# Altium PCB ArgoFC.PcbDoc (part 3 of 5)
Units mm, origin at the board's own origin, x right, y up, seen from the top; angles counter-clockwise.
Board outline 177.8 x 177.8 mm, 4 copper layers (Top Layer, GND Plane, PWR Plane, Bottom Layer), stack 0.603 mm thick; 373 components, 236 nets, 1289 pads, 686 vias.
Unrouted connection lines stored in the file: 16.
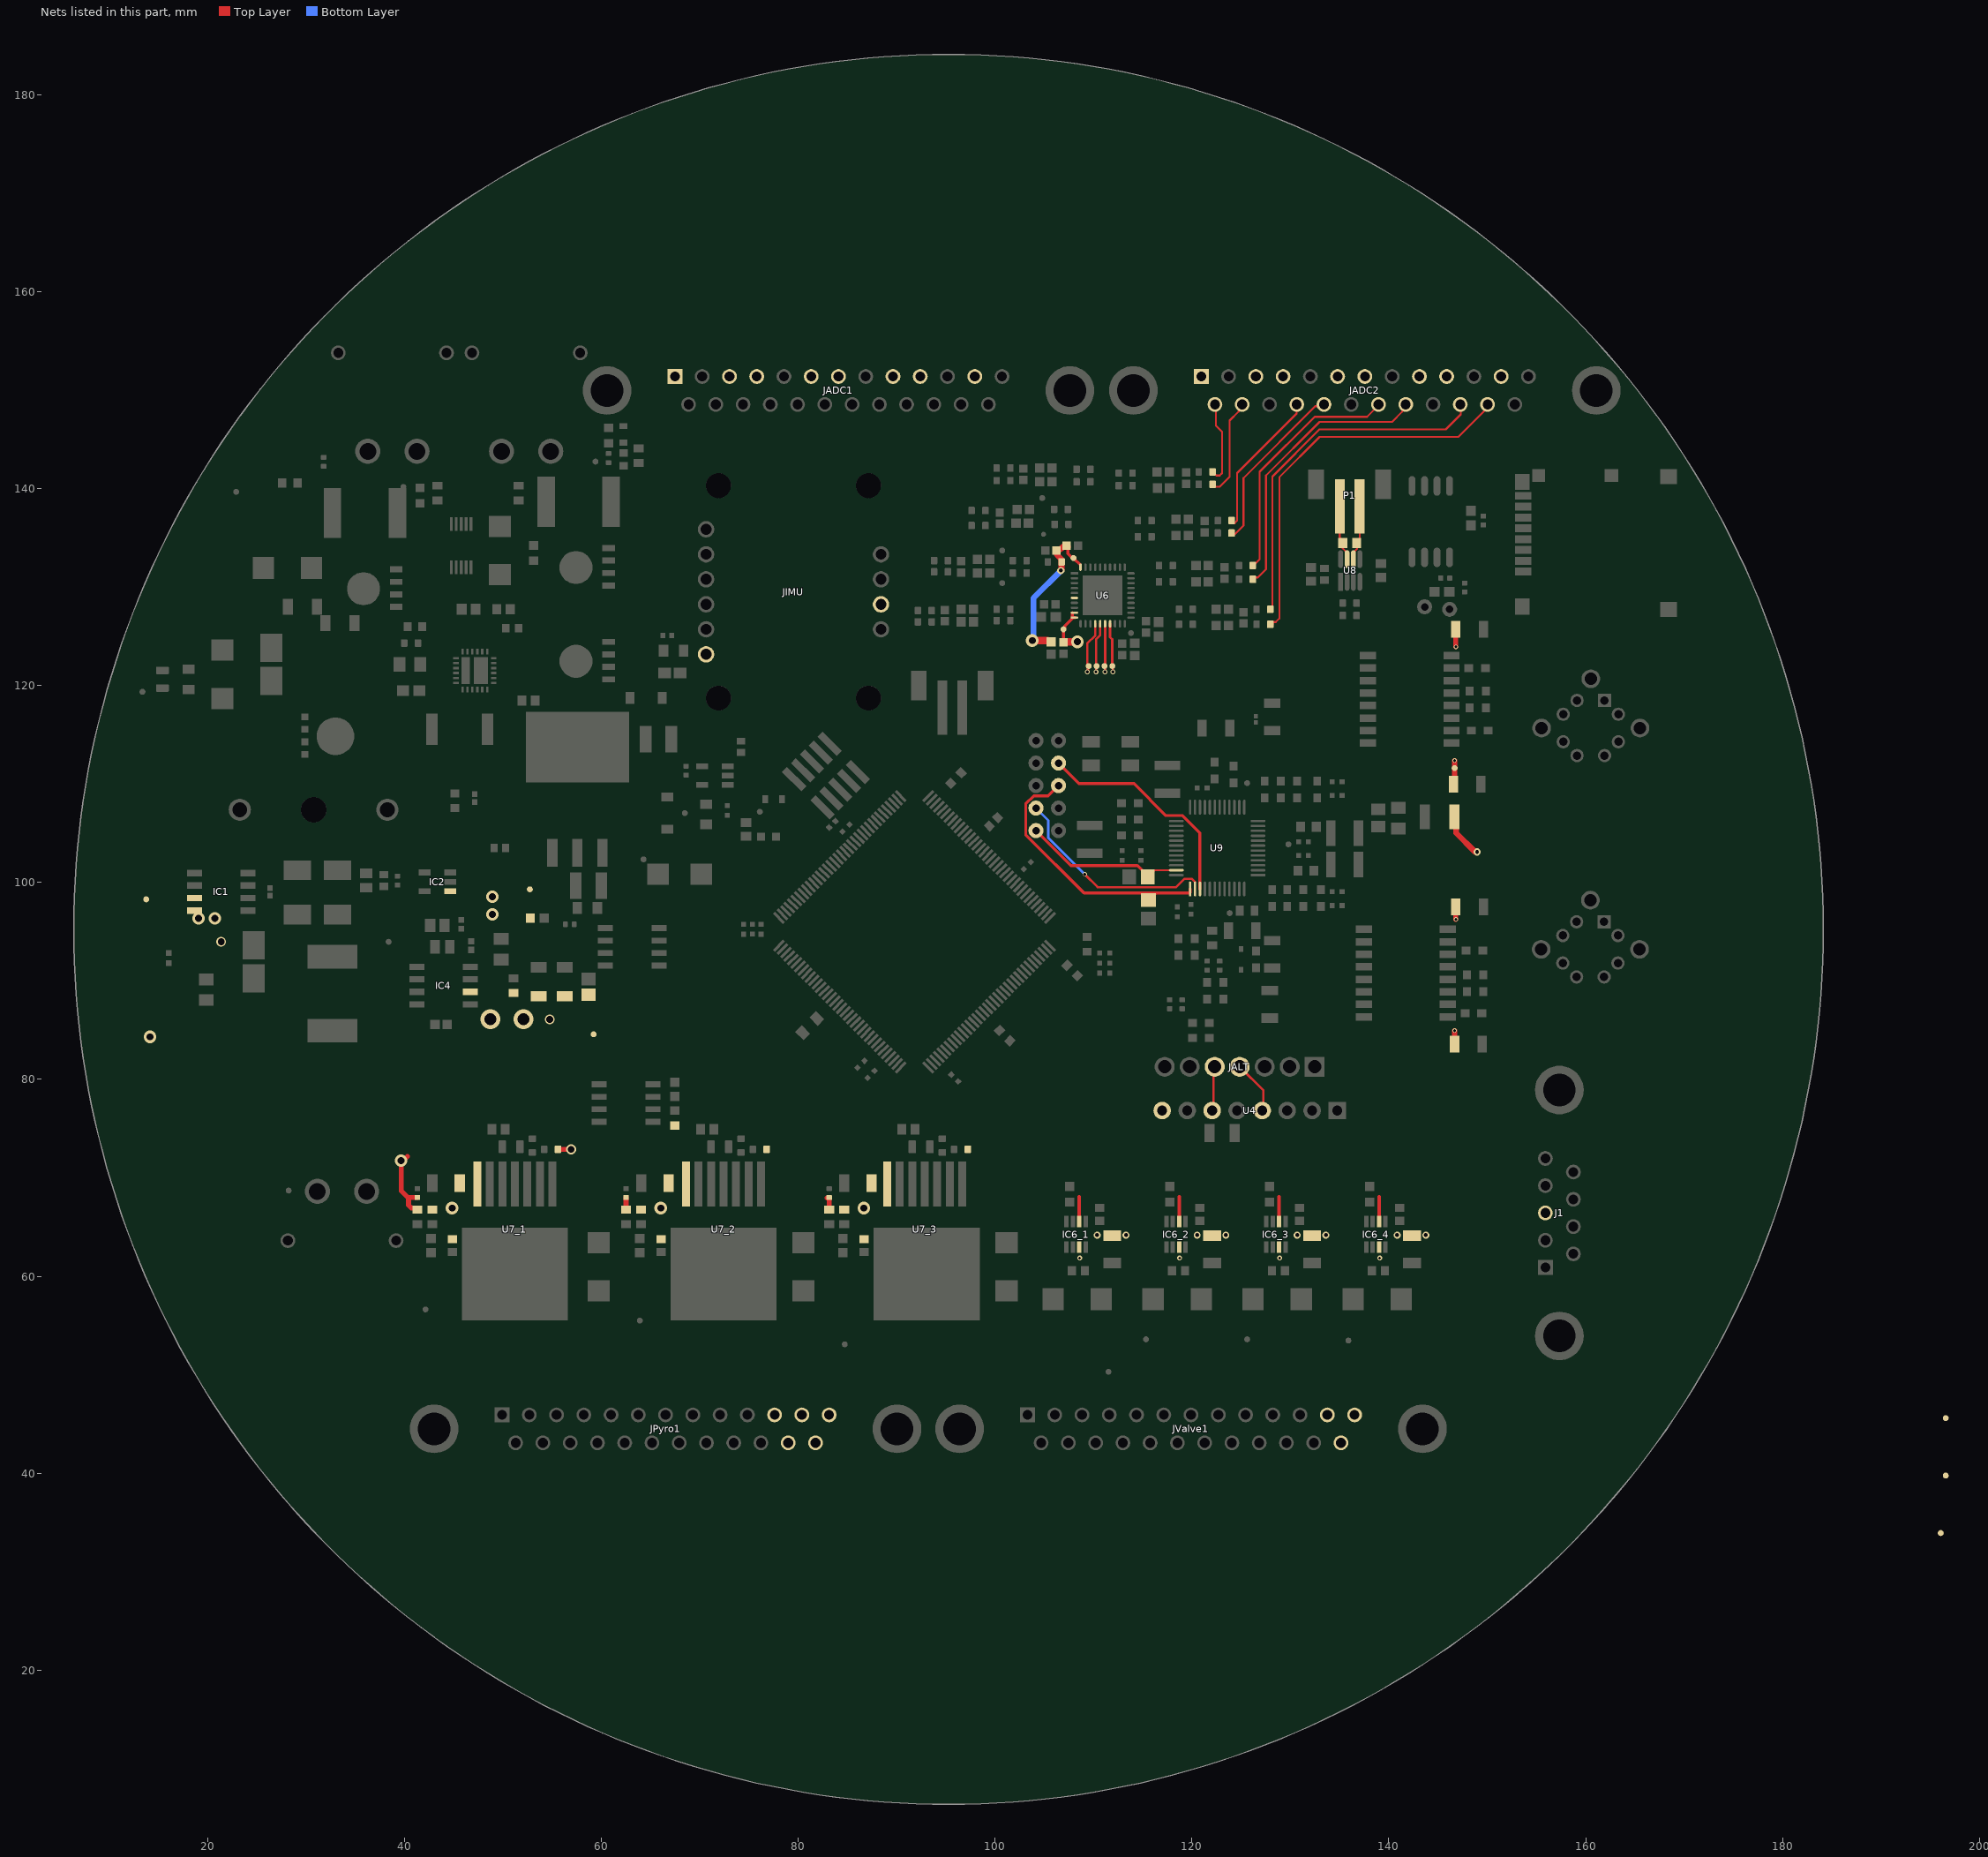
[diagram p4: the nets of this part, all layers, seen from the top]

## Part data (continued)
R8 R62_1 R62_2 R62_3 R63_1 R63_2 R63_3: library part CMP-009-00023-5, "Chip Resistor, 100 KOhm, +/- 1%, 0.1 W, -55 to 155 degC, 0603 (1608 Metric)", Case/Package=0603, Max Operating Temperature=155°C, Min Operating Temperature=-55°C, Power=100mW, Tolerance=1%, Voltage Rating=50V, Mounting Technology=SM, Pins=2, RoHS Compliant=True
R9 R11 RIMON1: library part CMP-2001-04908-2, "RES Thick Film, 10kΩ, 1%, 0.125W, 100ppm/°C, 0805", Case Code (Imperial)=0805, Case Code (Metric)=2012, Max Operating Temperature=155°C, Min Operating Temperature=-55°C, Package Quantity=5000, Power Rating=125mW, Resistance=10kR, Temperature Coefficient=100ppm/°C, Tolerance=1%, Voltage Rating=150V, Case/Package=0805, Composition="Thick Film", Contact Plating=Tin, Depth=1.25mm, Height=0.45mm, Lead Free="Lead Free", Length=2mm, Military Standard=Not, Packaging="Tape and Reel", Radiation Hardening=No, Termination=SMD/SMT, Voltage Rating (DC)=150V, Weight=0.000194oz, Width=1.25mm
R10: library part CMP-2002-08356-2, "RES Thick Film, 20kΩ, 1%, 0.063W, 100ppm/°C, 0402", Case Code (Imperial)=0402, Case Code (Metric)=1005, Max Operating Temperature=155°C, Max Power Dissipation=63mW, Min Operating Temperature=-55°C, Package Quantity=10, Resistance=20kR, Temperature Coefficient=100ppm/°C, Tolerance=1%, Voltage Rating=50V, Case/Package=0402, Composition="Thick Film", Contact Plating=Tin, Depth=0.5mm, Features="Automotive AEC-Q200", Height=0.35mm, Lead Free="Lead Free", Length=1mm, Military Standard=Not, Mount="Surface Mount", Number of Pins=2, Number of Terminations=2, Packaging="Tape and Reel", Power Rating=63mW, Radiation Hardening=No, Termination=SMD/SMT, Voltage Rating (DC)=50V, Weight=2.3E-05oz, Width=0.5mm, Working Voltage=50V
R12: library part CMP-2002-08313-2, "CRCW04021K96FKED  RES Thick Film, 1.96kΩ, 1%, 0.063W, 100ppm/°C, 0402", Case Code (Imperial)=0402, Case Code (Metric)=1005, Max Operating Temperature=155°C, Max Power Dissipation=63mW, Min Operating Temperature=-55°C, Package Quantity=10, Resistance=1.96kR, Temperature Coefficient=100ppm/°C, Tolerance=1%, Voltage Rating=50V, Case/Package=0402, Composition="Thick Film", Contact Plating=Tin, Depth=0.5mm, Features="Automotive AEC-Q200", Height=0.35mm, Length=1mm, Military Standard=Not, Number of Pins=2, Number of Terminations=2, Packaging="Tape and Reel", Power Rating=63mW, Radiation Hardening=No, Termination=SMD/SMT, Weight=2.3E-05oz, Width=0.5mm
R13 R70: library part CMP-009-00199-1, "Chip Resistor, 20 Ohm, +/- 1%, 100 mW, -55 to 155 degC, 0603 (1608 Metric)", Case/Package=0603, Max Operating Temperature=155°C, Min Operating Temperature=-55°C, Power=100mW, Tolerance=1%, Voltage Rating=75V, Mounting Technology=SM, Pins=2, RoHS Compliant=True
R16: library part CMP-2003-04797-2, "RES Thick Film, 0Ω, 0.25W, 1206", Case Code (Imperial)=1206, Case Code (Metric)=3216, Max Operating Temperature=155°C, Max Power Dissipation=250mW, Min Operating Temperature=-55°C, Package Quantity=10000, Resistance=0mR, Voltage Rating=200V, Case/Package=1206, Composition="Thick Film", Contact Plating=Tin, Depth=1.6mm, Features="Automotive AEC-Q200", Height=0.024inch, Lead Free="Lead Free", Length=3.2mm, Military Standard=Not, Number of Terminations=2, Packaging="Tape and Reel", Power Rating=250mW, Radiation Hardening=No, Termination=SMD/SMT, Voltage Rating (DC)=200V, Weight=0.000353oz, Width=0.063inch
R18_1 R18_2 R18_3 R18_4: library part 0603WAF5101T5E, "0603 5K resistor, Pick based component in JLCPCB lib", Manufacturer_Name="UNI-ROYAL(Uniroyal Elec)", Datasheet Link=https://datasheet.lcsc.com/szlcsc/Uniroyal-Elec-0603WAF5101T5E_C23186.pdf, Height=0.55mm, Manufacturer_Part_Number=0603WAF5101T5E
R19 R20 R21 R22 R23 R24 R25 R26 R27 R28 R29 R30 R31 R32 R33 R34 R35 R36 R37 R38 R39 R40 R41 R42 R43 R44 R45 R46 R47 R48 R49 R50 R64_1 R64_2 R64_3 R65_1 R65_2 R65_3 RIlimit1: library part CMP-009-00176-3, "Chip Resistor, 120 Ohms, +/-5 %, 0.1 W, -55 to 155 degC, 0603", Case/Package=0603, Max Operating Temperature=155°C, Min Operating Temperature=-55°C, Power=100mW, Tolerance=5%, Pins=2
R53 R57 R74 R95: library part CMP-009-00014-5, "Chip Resistor, 1 KOhm, +/-1%, 0.1 W, -55 to 155 degC, 0603 (1608 Metric)", Case/Package=0603, Max Operating Temperature=155°C, Min Operating Temperature=-55°C, Power=100mW, Tolerance=1%, Voltage Rating=50V, Mounting Technology=SM, Pins=2, RoHS Compliant=True
R54: library part CMP-2000-00054-1, "Fixed Resistor, Thin Film, 0.1W, 210000ohm, 75V, 0.1% +/-Tol, 25ppm/Cel, Surface Mount, 0603", Manufacturer=Panasonic, Part Number=ERA3AEB392V
R55 R60: library part CMP-1012-00623-3, "Chip Resistor, 10 KOhm, +/- 1%, 0.1 W, -55 to 155 degC, 0603 (1608 Metric), RoHS, Tape and Reel", Case Code (Imperial)=0603, Case Code (Metric)=1608, Manufacturer=Panasonic, Max Operating Temperature=155degC, Max Power Dissipation=100mW, Min Operating Temperature=-55degC, Package Description="2-Pin Surface Mount Device, Body 1.6 x 0.85 mm", Package Quantity=1, Package Reference=603, Resistance=10KOhm, Temperature Coefficient=100ppm\/degreesC, Tolerance=1%, Voltage Rating=75V, Case\/Package=0603, Composition=ThickFilm, Contact Plating=Tin, Datasheet URL=https://industrial.panasonic.com/cdbs/www-data/pdf/RDA0000/AOA0000C304.pdf, Datasheet Version=02/2017, Depth=0.8mm, Height=0.45mm, Lead Free=LeadFree, Length=1.6mm, Manufacturer URL=http://www.panasonic.com/, Military Standard=Not, Mount=SurfaceMount, Mounting Technology=SurfaceMount, Number of Pins=2, Number of Terminations=2, Packaging=TapeandReel, Power Rating=100mW, Radiation Hardening=No, REACH SVHC=NoSVHC, RoHSCompliant=true, Termination=SMD/SMT, Voltage Rating (DC)=75V, Width=0.031inch
R56 Rpg1: library part CMP-2000-02954-1, "Fixed Resistor, Metal Glaze/thick Film, 0.1W, 18000ohm, 75V, 1% +/-Tol, 100ppm/Cel, Surface Mount, 0603", Manufacturer="Vishay Dale", Part Number=CRCW0603182KFKEA
R58: library part CMP-009-00017-5, "Chip Resistor, 10 KOhm, +/- 1%, 01 W, -55 to 155 degC, 0603 (1608 Metric)", Case/Package=0603, Max Operating Temperature=155°C, Min Operating Temperature=-55°C, Power=100mW, Tolerance=1%, Voltage Rating=50V, Mounting Technology=SM, Pins=2, RoHS Compliant=True
R66_1 R66_2 R66_3: library part CMP-009-00102-2, "470R 0.125W 5% 0805 (2012 Metric)  SMD", Case/Package=0805, Power=125mW, Tolerance=5%, Mounting Technology=SMT, Pins=2
R67_1 R67_2 R67_3: library part CMP-2000-03159-1, "CRCW06032K00FKEA", Manufacturer="Vishay Dale", Part Number=CRCW06032K00FKEA
R68 R69: library part CMP-009-00027-5, "Chip Resistor, 22 Ohm, +/- 1%, 100 mW, -55 to 155 degC, 0603 (1608 Metric)", Case/Package=0603, Max Operating Temperature=155°C, Min Operating Temperature=-55°C, Power=100mW, Tolerance=1%, Voltage Rating=75V, Mounting Technology=SM, Pins=2, RoHS Compliant=True
R72 R81 R82 R83 R85 R93 R94 R96: library part CMP-2000-04818-3, "RES 10KΩ 1.00% 0.1W 0603", Case Code (Imperial)=0603, Case Code (Metric)=1608, Max Operating Temperature=155°C, Max Power Dissipation=100mW, Min Operating Temperature=-55°C, Package Quantity=1, Ratings=AEC-Q200, Resistance=10kR, Resistor Type="Thick Film", Temperature Coefficient=100ppm/°C, Tolerance=1%, Voltage Rating=50V, Case/Package=0603, Construction=Rectangular, Depth=0.8mm, Features="Moisture Resistant", Height=0.45mm, Lead Free="Lead Free", Length=1.6mm, Military Standard=Not, Mount="Surface Mount", Number of Terminations=2, Packaging="Tape and Reel", Power Rating=100mW, RoHS Compliant=Yes, Series=AC, Size Code=0603, Termination=SMD/SMT, Width=0.8mm
R73 R80: library part CMP-2001-00644-1, Manufacturer=Panasonic, Part Number=ERA6AEB472V
R75: library part CMP-2001-04399-1, Manufacturer=Panasonic, Part Number=ERJ-6ENF1182V
R76 R77 R78 R79 R89 R90 R91 R92: library part CMP-2000-04466-2, "RES SMD 49.9 OHM 0.1% 1/10W 0603", Manufacturer=Yageo, Manufacturer Part Number=RT0603BRD0749R9L, Package=RT0603, Power Rating=0.1W, Temperature="-55°C to +155°C", Temperature Coefficient="25 ppm/°C", Temperature Range High=+155°C, Temperature Range Low=-55°C, Tolerance=0.001, Voltage Rating=75V, Automotive=No, Category=Res, ComponentLink2Description=Datasheet, ComponentLink2URL=http://www.yageo.com/documents/recent/PYu-RT_1-to-0.01_RoHS_L_9.pdf, Composition="Thin Film", Device Class L1="Passive Components", Device Class L2=Resistors, Device Class L3="Chip SMD Resistors", Digikey Description="RES SMD 49.9 OHM 0.1% 1/10W 0603", Footprint Url=http://www.yageo.com/exep/pages/download/literatures/PYu-R_Mount_10.pdf, Height=0.55mm, Ipc Land Pattern Name=RESC16080X45, Lead Free=Yes, Mouser Description="Res Thin Film 0603 49.9 Ohm 0.1% 1/10W ±25ppm/°C Molded SMD SMD Paper T/R", Octopart=https://octopart.com/rt0603brd0749r9l-yageo-1274115, Resistance=49.9Ω, RoHS=TRUE, Series=RT
R84 R86 R87 R88 R98 R99 R100 R102: library part CMP-03412-022448-1, "RES SMD 75 OHM 0.5% 1/10W 0603", Manufacturer=Yageo, Manufacturer Part Number=RT0603DRE0775RL, Package=RT0603, Power Rating=0.1W, Temperature="-55°C to +155°C", Temperature Coefficient="50 ppm/°C", Temperature Range High=+155°C, Temperature Range Low=-55°C, Tolerance=0.005, Voltage Rating=75V, Automotive=No, Category=Res, ComponentLink2Description=Datasheet, ComponentLink2URL=http://www.yageo.com/documents/recent/PYu-RT_1-to-0.01_RoHS_L_9.pdf, Composition="Thin Film", Device Class L1="Passive Components", Device Class L2=Resistors, Device Class L3="Chip SMD Resistors", Digikey Description="RES SMD 75 OHM 0.5% 1/10W 0603", Footprint Url=http://www.yageo.com/exep/pages/download/literatures/PYu-R_Mount_10.pdf, Height=0.55mm, Ipc Land Pattern Name=RESC16080X45, Lead Free=Yes, Octopart=https://octopart.com/rt0603dre0775rl-yageo-1170737, Resistance=75Ω, RoHS=TRUE, Series=RT
R97 R101 R103 R104: library part CMP-03412-006815-1, "RES SMD 220 OHM 1% 1/10W 0603", Manufacturer=Yageo, Manufacturer Part Number=RT0603FRE07220RL, Package=RT0603, Power Rating=0.1W, Temperature="-55°C to +155°C", Temperature Coefficient="50 ppm/°C", Temperature Range High=+155°C, Temperature Range Low=-55°C, Tolerance=0.01, Voltage Rating=75V, Automotive=No, Category=Res, ComponentLink2Description=Datasheet, ComponentLink2URL=http://www.yageo.com/documents/recent/PYu-RT_1-to-0.01_RoHS_L_9.pdf, Composition="Thin Film", Device Class L1="Passive Components", Device Class L2=Resistors, Device Class L3="Chip SMD Resistors", Digikey Description="RES SMD 220 OHM 1% 1/10W 0603", Footprint Url=http://www.yageo.com/exep/pages/download/literatures/PYu-R_Mount_10.pdf, Height=0.55mm, Ipc Land Pattern Name=RESC16080X45, Lead Free=Yes, Mouser Description="Thin Film Resistors 1/10W 220 ohm 1% 50ppm", Octopart=https://octopart.com/rt0603fre07220rl-yageo-39861932, Resistance=220Ω, RoHS=TRUE, Series=RT
RC1: library part CMP-009-00001-5, "Chip Resistor, 0 Ohm, +/- 1%, 125 mW, -55 to 155 degC, 0805 (2012 Metric)", Case/Package=0805, Max Operating Temperature=155°C, Min Operating Temperature=-55°C, Power=125mW, Tolerance=1%, Voltage Rating=150V, Mounting Technology=SM, Pins=2, RoHS Compliant=True
RG1: library part CMP-02407-006382-1, "RES Thick Film, 2Ω, 5%, 1W, 200ppm/°C, 2512", Case Code (Imperial)=2512, Case Code (Metric)=6432, Max Operating Temperature=155°C, Max Power Dissipation=1W, Min Operating Temperature=-55°C, Package Quantity=1, Resistance=2R, Temperature Coefficient=200ppm/°C, Tolerance=5%, Voltage Rating=500V, Case/Package=2512, Composition="Thick Film", Contact Plating=Tin, Depth=3.15mm, Features="Automotive AEC-Q200", Height=0.6mm, Lead Free="Lead Free", Length=6.3mm, Military Standard=Not, Number of Pins=2, Number of Terminations=2, Packaging="Tape and Reel", Power Rating=1W, Radiation Hardening=No, Termination=SMD/SMT, Voltage Rating (DC)=500V, Weight=0.001429oz, Width=0.124inch
Rhold1: library part CMP-009-00138-3, "Chip Resistor, 2 kOhms, +/-5 %, 63 mW, -55 to 155 degC, 0402", Case/Package=0402, Max Operating Temperature=155°C, Min Operating Temperature=-55°C, Power=63mW, Tolerance=5%, Pins=2
RS1_1 RS1_2 RS1_3: library part CMP-2000-03379-3, "RES SMD 47K OHM 1% 1/10W 0603 CRCW060347K0FKEA", Case Code (Imperial)=0603, Case Code (Metric)=1608, Max Operating Temperature=155°C, Max Power Dissipation=100mW, Min Operating Temperature=-55°C, Package Quantity=5000, Resistance=47kR, Resistance Tolerance=1%, Resistor Type="Thick Film", Temperature Coefficient=100ppm/°C, Voltage Rating=75V, Case/Package=0603, Construction=Rectangular, Contact Plating=Tin, Depth=0.85mm, Features="Automotive AEC-Q200", Height=0.45mm, Lead Free="Lead Free", Length=1.55mm, Military Standard=Not, Mount="Surface Mount", Number of Terminations=2, Packaging="Tape and Reel", Power Rating=100mW, Radiation Hardening=No, RoHS Compliant=Yes, Series=CRCW, Size Code=0603, Technology="THICK FILM", Termination=SMD/SMT, Tolerance=1%, Voltage Rating (DC)=75V, Weight=7.1E-05oz, Width=0.85mm
RT1: library part CMP-06022-000553-2, "NTC Thermistor for Temperature Sensor, 0603, 47kΩ, 5%, 0.046mA, 5V", Case Code (Imperial)=0603, Case Code (Metric)=1608, Current Rating=140uA, Max Operating Temperature=125°C, Max Power Dissipation=100mW, Min Operating Temperature=-40°C, Package Quantity=4000, Resistance=47kR, Resistance Tolerance=5%, Accuracy=0.5%, Case/Package=0603, Depth=0.8mm, Height=0.8mm, Lead Free="Lead Free", Length=1.6mm, Mount="Surface Mount", Number of Pins=2, Packaging="Tape and Reel", Power Rating=100mW, Radiation Hardening=No, REACH SVHC="No SVHC", Series=NCP, Termination=SMD/SMT, Thickness=150um, Tolerance=5%, Width=0.8mm
T1 T2: library part CMP-2000-05323-2, "MODULE XFRMR SGL ETHR LAN 16SOIC", Case/Package=Module, DC Resistance (DCR)=1.5R, Isolation Voltage=1.5kV, Max Operating Temperature=85°C, Min Operating Temperature=-40°C, Package Quantity=40, Depth=9.53mm, Height=5.97mm, Height - Seated (Max)=6.22mm, Insertion Loss=-1dB, Lead Free="Lead Free", Lead/Base Style="Gull Wing", Length=12.7mm, Mount="Surface Mount", Number of Pins=16, Packaging=Rail/Tube, Radiation Hardening=No, Return Loss=-12dB, RoHS Compliant=Yes, Series=-, Shielding=Unshielded, Termination=SMD/SMT, Turns Ratio=1:1, Width=7.11mm
TP1 TP2 TP3 TP4 TP5 TP6 TP7 TP8 TP15_1 TP15_2 TP15_3 TP15_4 TP16 TP17 TP18 TP19 TP20 TP21 TP22 TP23 TP24 TP25 TP26 TP27_1 TP27_2 TP27_3 TP28_1 TP28_2 TP28_3 TP29 TP30 TP31 TP32 TPCS1 TPMISO1 TPMOSI1 TPSCLK1: library part CMP-00028-00002-2, "0.6mm round", Pins=1
U1 U2: library part CMP-014-00017-2, "Single Supply Dual Operational Amplifier, 3 to 32 V, 0 to 70 degC, 8-Pin SOIC, Pb-Free, Tape and Reel", Case/Package=SOIC, Manufacturer="ON Semiconductor", Max Dual Supply Voltage=16V, Max Input Voltage=28.3V, Max Operating Temperature=70°C, Max Supply Voltage=44V, Min Dual Supply Voltage=1.5V, Min Input Voltage=0uV, Min Operating Temperature=0°C, Min Supply Voltage=2.3V, Nominal Dual Supply Voltage=12V, Nominal Supply Current=35uA, Nominal Voltage Gain=100dB, Output Current=40mA, Package Description="8-Pin Small Outline Integrated Circuit, Body 4.9 x 3.9 mm, Pitch 1.27 mm", Package Quantity=2500, Package Reference=SOIC-8-751-07, Channels=2, Common Mode Rejection Ratio=65dB, Datasheet URL=http://www.onsemi.cn/pub_link/Collateral/LM358-D.PDF, Datasheet Version="Rev. 32, 10/2016", Manufacturer URL=http://www.onsemi.com/, Mounting Technology=SM, Nominal Gain Bandwith Product=200KHz, Nominal Supply Voltage=12V, Packaging=TapeandReel, Pins=8, RoHS Compliant=True, Slew Rate=0.07V/us
U3: library part CMP-0062-00591-5, "5A Low Dropout Positive Regulators, 3-pin TO-263, Pb-Free", Manufacturer="Texas Instruments", PackageTopMarking=NSUZXYTTE#*LM1084*IS-3.3, PartNumber=LM1084IS-3.3/NOPB, PowerWise=N, Code_JEDEC=MO-169-AA, ComponentLink1Description="Datasheet URL", ComponentLink1URL=http://www.ti.com/general/docs/lit/getliterature.tsp?genericPartNumber=LM1084&fileType=pdf, CompType="LDO IC", High-Reliability=Y, PackageDescription="TO-263, Molded, .400 x .390 x .180in, 3 Lead, .1in Pitch, Surface Mount", PackageReference=KTT0003B, PinCount=3, RoHS=Y
U4: library part CMP-144239-000001-1, "BMP388 - PRECISION BAROMETRIC PR"
U5: library part CMP-0378-00041-1, "16 Mbit SPI Serial Flash, 2.7 to 3.6 V, 50 MHz, 0 to 70 degC, 8-pin SOIC (S2A8), Tube", Manufacturer=Microchip, ComponentLink1Description="Manufacturer URL", ComponentLink1URL=http://www.microchip.com, ComponentLink2Description=Datasheet, ComponentLink2URL=http://ww1.microchip.com/downloads/en/DeviceDoc/25044A.pdf, ComponentLink3Description="Package Specification", ComponentLink3URL=http://ww1.microchip.com/downloads/en/DeviceDoc/25051A.pdf, ComponentLink4Description="Product URL", ComponentLink4URL=http://www.microchip.com/SST25VF016B, DatasheetVersion="Rev. A", Mounting Technology="Surface Mount", PackageDescription="8-Lead Plastic Small Outline Intergrated Circuit, 5.275 x 5.275 mm Body, 1.27 mm Pitch", PackageReference=SOIC-S2A8, PackageVersion="Rev. A", PartNumber=SST25VF016B-50-4C-S2AF
U6: library part CMP-09081-000008-1, "IC ADC 24BIT SIGMA-DELTA 40LFCSP", Case/Package="LFCSP EP", Max Input Voltage=2.5V, Max Operating Temperature=105°C, Max Power Dissipation=28mW, Max Supply Voltage=5.5V, Min Operating Temperature=-40°C, Min Supply Voltage=2V, Nominal Supply Current=2.12mA, Operating Supply Voltage=5V, Package Quantity=490, Power Dissipation=9.96mW, Contact Plating=Tin, Height=0.75mm, Interface=SPI, Lead Free="Contains Lead", Length=6.1mm, Min Input Voltage=2.5V, Mount="Surface Mount", Number of A/D Converters=1, Number of Bits=24, Number of Channels=16, Number of Converters=1, Number of Elements=1, Number of Pins=40, Output Type=TTL, Packaging=Tray, Polarity=Bipolar, REACH SVHC="No SVHC", Reference Voltage=2.5V, Resolution=24b, Sampling Rate=31.25KS/s, Supply Type=Single, Width=6.1mm
U7_1 U7_2 U7_3: library part CMP-32854-000005-1, "IC HALF-BRIDGE DRVR 2 CH TO263", Manufacturer=Infineon, Max Junction Temp=+150°C, Max Supply Voltage=40V, Min Supply Voltage=8V, Nominal Supply Current=2.3mA, Package=PG-TO263-7, Temperature="-40°C to +150°C", Temperature Range Low=-40°C, Automotive=No, Category=IC, ComponentLink2Description=Datasheet, ComponentLink2URL=https://www.infineon.com/dgdl/Infineon-IFX007T-DS-v01_00-EN.pdf?fileId=5546d46265f064ff0166433484070b75, Device Class L1="Integrated Circuits (ICs)", Device Class L2="Power Management ICs", Device Class L3="Motor Drivers", Digikey Description="IC HALF-BRIDGE DRVR 2 CH TO263", Footprint Url=https://www.infineon.com/cms/en/product/packages/PG-TO263/PG-TO263-7-1/, Height=4.5mm, Lead Free=Yes, Manufacturer Part Number=IFX007TAUMA1, Mouser Description="integrated high current half bridge for motor drive applications", Number Of Outputs=1, Octopart=https://octopart.com/ifx007tauma1-infineon-94578162, RoHS=TRUE, Standoff Height=0.1mm, Temperature Range High=+150°C
U8: library part CMP-04872-000203-1, "IC TRANSCEIVER 1/1 SOT23-8", Case/Package=SOT-23-8, Max Operating Temperature=125°C, Min Operating Temperature=-40°C, Lead Free="Lead Free", Mount="Surface Mount", Packaging="Tape and Reel", Receiver Hysteresis=120mV, RoHS Compliant=Yes
U9: library part CMP-06281-000067-1, "IC ETHERNET SWITCH 3PORT 48-LQFP", Case/Package=LQFP, Max Operating Temperature=85°C, Max Supply Current=114mA, Max Supply Voltage=3.465V, Min Operating Temperature=-40°C, Min Supply Voltage=1.71V, Nominal Supply Current=85mA, Operating Supply Voltage=3.3V, Package Quantity=250, Data Rate=100Mbps, Height=1.45mm, Interface=I2C, Lead Free="Lead Free", Length=7.1mm, Mount="Surface Mount", Number of Functions=3, Number of Pins=48, Number of Ports=3, Number of Transceivers=3, Packaging=Tray, Radiation Hardening=No, REACH SVHC="No SVHC", RoHS Compliant=Yes, Series=-, Supply Current=85mA, Supply Voltage-Nom=3.3V, Width=7.1mm
XF1: library part CMP-1502-00234-1, "WR-FSH Fuse Holder Blocks Fuse Holder Blocks Clip Cover for PCB", Manufacturer="Wurth Elektronik", Operating Temperature=-30to120degC, Datasheet URL=https://katalog.we-online.de/em/datasheet/696105003002.pdf, Fuse Size=5x20mm, Manufacturer URL=http://www.we-online.de, Mounting Technology=THT, Package Reference=696105003002, Packaging=Box, Part Number=696105003002, Publisher=WurthElektronik

## Free pads (board coordinates)
  round 1.524 hole 0.762: 7(146.177,127.762) 8(143.637,128.016) 9(106.426,114.427) 10(106.426,112.141) 11(106.426,109.855) 12(106.426,105.283) 13(106.426,107.569) 14(104.14,114.427) 15(104.14,112.141) 16(104.14,109.855) 17(104.14,107.569) 18(104.14,105.283)

## Via types
v1: diameter 0.5, hole 0.25, Top Layer to Bottom Layer, 327 vias
v2: diameter 0.45, hole 0.3, Top Layer to Bottom Layer, 147 vias
v3: diameter 1.27, hole 0.711, Top Layer to Bottom Layer, 80 vias
v4: diameter 1, hole 0.6, Top Layer to Bottom Layer, 28 vias
v5: diameter 1, hole 0.7, Top Layer to Bottom Layer, 21 vias
v6: diameter 0.75, hole 0.5, Top Layer to Bottom Layer, 17 vias
v7: diameter 0.5, hole 0.3, Top Layer to Bottom Layer, 15 vias
v8: diameter 0.7, hole 0.4, Top Layer to Bottom Layer, 14 vias
v9: diameter 0.75, hole 0.4, Top Layer to Bottom Layer, 12 vias
v10: diameter 0.6, hole 0.35, Top Layer to Bottom Layer, 7 vias
v11: diameter 0.6, hole 0.3, Top Layer to Bottom Layer, 5 vias
v12: diameter 0.7, hole 0.5, Top Layer to Bottom Layer, 3 vias
v13: diameter 0.6, hole 0.4, Top Layer to Bottom Layer, 2 vias
v14: diameter 2, hole 1.2, Top Layer to Bottom Layer, 2 vias
v15: diameter 7.62, hole 7.62, Top Layer to Bottom Layer, 2 vias
v16: diameter 1, hole 0.5, Top Layer to Bottom Layer, 1 vias
v17: diameter 0.711, hole 0.711, Top Layer to Bottom Layer, 1 vias
v18: diameter 1, hole 0.711, Top Layer to Bottom Layer, 1 vias
v19: diameter 0.3, hole 0.2, Top Layer to Bottom Layer, 1 vias

## Nets (pads, with @x,y where several pads share a name; then routed paths per layer and width w, separated by ;. In a path a pad name is that pad's centre, name@x,y a point inside that pad or via, vN(x,y) a via of type N, cw(c..) or ccw(c..) an arc to the next point about the centre after c; other vN are vias at no path point)
5V: C57.1 C58.1 C79.1 C82.1 C83.1 IC2.1 J1.3 JADC1.1 JADC1.3 JADC1.4 JADC1.6 JADC1.7 JADC1.9 JADC1.10 JADC1.12 JADC2.1 JADC2.3 JADC2.4 JADC2.6 JADC2.7 JADC2.9 JADC2.10 JADC2.12 R2.2 TP4.1 TP18.1 TP20.1 U6.9 U6.10 U6.40 | length 20.9
  Top Layer w0.3: C57.1@106.934,124.4 TP20.1@106.934,125.603 ; TP20.1@106.934,125.73 106.934,125.811 107.069,125.946 107.069,126.056 107.922,126.909 U6.10@108.122,126.909 ; C83.1@107.373,134.114 107.373,133.419 TP18.1@107.95,132.842 ; U6.10@107.823,126.909 107.823,127.379 U6.9@107.853,127.409 ; TP18.1@108.077,132.842 U6.40@108.585,132.334
  Top Layer w0.6: C58.1@105.664,124.46 C58.1@105.692,124.488 ; v9(106.68,131.699) 106.68,131.74 106.737,131.796 106.737,132.58 C82.1@106.745,132.588 106.715,132.618 106.715,132.874 106.269,133.32 106.269,133.701 C79.1@106.239,133.731 106.364,133.856 106.584,133.856 106.715,133.987 106.772,133.987 106.899,134.114 107.123,134.114 C83.1@107.248,134.239 C83.1@107.373,134.114
  Top Layer w0.762: v3(103.759,124.587) 105.339,124.587 105.382,124.544 105.57,124.544 C58.1@105.664,124.45 ; C57.1@107.061,124.46 v3(108.338,124.46)
  Bottom Layer w0.6: v3@103.886,124.587 103.886,128.905 v9(106.68,131.699)
  other v3: 48.895,96.774 48.895,98.552
24Vin: C13.1 C14.2 C15.2 C55_1.2 C55_2.2 C55_3.2 C55_4.2 C91_1.2 C91_2.2 C91_3.2 C92_1.2 C92_2.2 C92_3.2 IC1.3 IC1.4 IC4.2 IC6_1.7 IC6_2.7 IC6_3.7 IC6_4.7 JPyro1.11 JPyro1.12 JPyro1.13 JPyro1.24 JPyro1.25 JValve1.12 JValve1.13 JValve1.25 R3.2 R8.2 R62_1.2 R62_2.2 R62_3.2 TP2.1 TP6.1 U7_1.7 U7_2.7 U7_3.7
  other v1: 108.585,61.849 118.745,61.849 128.905,61.849 139.065,61.849
  other v3: 44.799,66.929 66.008,66.929 86.655,66.929 14.097,84.328 19.05,96.358 20.701,96.358
  other v5: 54.737,86.106 21.336,93.98
  other v8: 110.363,64.179 113.284,64.179 120.523,64.179 123.444,64.179 130.683,64.179 133.604,64.179 140.843,64.179 143.764,64.179
  other v14: 48.7,86.106 52.07,86.106
ADC_CS_3.3V: TPSCLK1.1 U6.17 | length 5.1
  Top Layer w0.24: U6.17@111.666,126.295 111.666,124.935 111.887,124.714 111.887,121.968 111.956,121.898 v7@111.956,121.335
  other v7: 111.95,121.412
ADC_MISO_3.3V: TPMISO1.1 U6.14 | length 5.3
  Top Layer w0.24: v7(109.347,121.412) 109.347,121.482 109.431,121.566 109.431,121.877 TPMISO1.1@109.474,121.92 ; TPMISO1.1@109.5,122 109.5,122.097 109.354,122.243 109.354,124.297 110.166,125.11 U6.14@110.166,126.295
ADC_MOSI_3.3V: TPMOSI1.1 U6.15 | length 5.2
  Top Layer w0.24: v7@110.236,121.285 110.268,121.317 110.268,121.968 TPMOSI1.1@110.3,122 110.243,122.057 110.243,124.721 110.666,125.144 U6.15@110.666,126.295
  other v7: 110.236,121.412
ADC_Refout2.5V: U6.6
ADC_SCLK_3.3V: TPCS1.1 U6.16 | length 5.3
  Top Layer w0.24: U6.16@111.166,126.295 111.166,122.311 111.166,122.129 111.252,122.043 111.169,121.96 111.169,121.438 v7@111.252,121.355
  Top Layer w0.254: TPCS1.1@111.166,122.043 111.166,122.311
  other v7: 111.16,121.412
AIN8: JADC2.14 R46.1 | length 8.4
  Top Layer w0.2: R46.1@122.082,141.732 122.082,141.682 122.312,141.452 122.362,141.452 122.463,141.351 122.809,141.351 123.063,141.605 123.063,145.796 122.428,146.431 JADC2.14@122.428,148.463
AIN9: JADC2.15 R37.1 | length 10.5
  Top Layer w0.2: R37.1@122.082,140.462 122.082,140.438 122.312,140.208 122.809,140.208 123.825,141.224 123.825,146.939 124.741,147.855 124.741,147.868 125.552,148.68 JADC2.15@125.566,148.68
AIN10: JADC2.17 R36.1 | length 15
  Top Layer w0.2: R36.1@124.329,136.521 124.587,136.779 124.587,141.605 130.629,147.647 130.629,148.879 JADC2.17@130.683,148.933
AIN11: JADC2.18 R35.1 | length 18
  Top Layer w0.2: R35.1@124.311,135.36 125.222,136.271 125.222,141.097 132.516,148.391 132.81,148.391 133.058,148.638 133.058,148.933 133.351,148.933 JADC2.18@133.598,149.181
AIN12: JADC2.20 R34.1 | length 25
  Top Layer w0.2: R34.1@126.208,132.177 126.213,132.177 126.396,132.36 126.396,132.365 126.873,132.842 126.873,141.732 132.461,147.32 137.795,147.32 JADC2.20@139.143,148.668
AIN13: JADC2.21 R33.1 | length 28.7
  Top Layer w0.2: R33.1@126.368,130.686 126.368,130.968 126.396,130.997 126.679,130.997 127.508,131.826 127.508,141.351 132.969,146.812 140.335,146.812 141.37,147.847 141.37,147.877 141.721,148.228 JADC2.21@141.721,148.58
AIN14: JADC2.23 R32.1 | length 36.2
  Top Layer w0.2: R32.1@128.173,127.813 128.173,141.254 132.952,146.033 145.779,146.033 147.32,147.574 JADC2.23@147.32,148.59
AIN15: JADC2.24 R23.1 | length 40.3
  Top Layer w0.2: R23.1@128.211,126.179 128.211,126.461 128.212,126.463 128.495,126.463 128.871,126.839 128.871,141.19 132.969,145.288 147.066,145.288 JADC2.24@150.582,148.804
ALT_SCL: JALT.4 U4.4 | length 5.3
  Top Layer w0.254: JALT.4@124.841,81.28 127.254,78.867 U4.4@127.254,76.962
ALT_SDA: JALT.5 U4.6 | length 4.7
  Top Layer w0.254: U4.6@122.174,76.708 JALT.5@122.174,81.407
BMP_INT: U4.8
BNO_INT: JIMU.9
BNO_RST: JIMU.6
CANH: P1.1 R70.1 U8.7 | length 4.2
  Top Layer w0.2: P1.1@135.001,136.779 135.001,135.063 135.317,134.747 135.317,133.964 135.748,133.533 U8.7@135.748,132.857
CANL: P1.2 R70.2 U8.6 | length 4.2
  Top Layer w0.2: U8.6@136.398,132.857 136.398,133.533 136.779,133.914 R70.2@136.779,134.817 ; R70.2@136.849,134.817 137.033,135.001 P1.2@137.033,136.779
CHASSIS: C115.2 C116.2 C119.2 C120.2 CC1.2 TP32.1 | length 11.6
  Top Layer w0.5: C116.2@146.682,83.312 C116.2@146.682,83.566 146.682,84.96 v2(146.685,84.963) ; C120.2@146.682,110.744 146.682,112.392 v2(146.685,112.395) ; C115.2@146.809,97.536 146.812,97.533 v2(146.812,96.266) ; C119.2@146.809,125.73 146.809,123.955 v2(146.812,123.952)
  Top Layer w0.6: CC1.2@146.558,107.254 146.842,106.97 146.842,105.038 148.756,103.124 v9(148.971,103.124)
CMD_1: IC6_1.2 | length 2.2
  Top Layer w0.35: IC6_1.2@108.529,65.913 108.529,68.072
CMD_2: IC6_2.2 | length 2.2
  Top Layer w0.35: IC6_2.2@118.689,65.913 118.689,68.072
CMD_3: IC6_3.2 | length 2.2
  Top Layer w0.35: IC6_3.2@128.849,65.913 128.849,68.072
CMD_4: IC6_4.2 | length 2.2
  Top Layer w0.35: IC6_4.2@139.009,65.913 139.009,68.072
CMD_5: R64_1.1 | length 1.3
  Top Layer w0.5: R64_1.1@55.564,72.898 v5(56.896,72.898)
CMD_6: R64_2.1
CMD_7: R64_3.1
Continuity1: R63_1.1 RS2_1.1 TP27_1.1 | length 7.5
  Top Layer w0.5: 40.271,72.194 39.832,71.755 v3(39.624,71.755) 39.624,68.696 40.375,67.945 40.375,67.233 40.668,66.94 41.125,66.94 R63_1.1@41.275,66.79 ; 40.525,68.003 RS2_1.1@41.275,68.003
Continuity2: R63_2.1 RS2_2.1 TP27_2.1 | length 1.2
  Top Layer w0.5: R63_2.1@62.484,66.79 RS2_2.1@62.484,68.003
Continuity3: R63_3.1 RS2_3.1 TP27_3.1 | length 1.4
  Top Layer w0.5: RS2_3.1@82.908,67.956 RS2_3.1@83.058,67.956 ; R63_3.1@83.131,66.79 RS2_3.1@83.131,68.003
ENC28J60_CS_3.3V: pad.10 U9.39 | length 23
  Top Layer w0.3: pad.10@106.426,112.014 106.553,112.014 108.509,110.058 114.097,110.058 117.348,106.807 119.049,106.807 120.805,105.051 U9.39@120.805,99.354
ENC28J60_INT_3.3V: pad.18 R73.1 U9.35 | length 15.3
  Top Layer w0.2: 116.205,101.219 116.205,101.229 116.231,101.255 U9.35@118.404,101.255
  Top Layer w0.3: pad.18@104.267,105.029 104.394,105.029 107.707,101.716 114.447,101.716 115.504,100.659 R73.1@115.504,100.584
ENC28J60_MISO_3.3V: pad.17 U9.38 | length 21
  Top Layer w0.25: v2(109.093,100.838) 110.399,99.532 118.378,99.532 119.231,100.386 119.97,100.386 120.269,100.087 U9.38@120.269,100.076
  Bottom Layer w0.25: pad.17@104.14,107.569 105.387,106.322 105.387,104.544 v2(109.093,100.838)
ENC28J60_MOSI_3.3V: pad.11 R80.1 U9.37 | length 27.9
  Top Layer w0.3: pad.11@106.426,109.855 105.381,108.81 103.912,108.81 103.101,107.999 103.101,104.853 109.021,98.933 109.728,98.933 116.346,98.933 ; R80.1@115.57,98.232 115.645,98.232 116.346,98.933 ; U9.37@119.805,99.354 119.805,98.962 119.776,98.933 116.346,98.933